# Altium PCB MSE450_G05_ASTEROIDS.PcbDoc
Units mm, origin at the board's own origin, x right, y up, seen from the top; angles counter-clockwise.
Board outline 75 x 130 mm, 2 copper layers (Top Layer, Bottom Layer); 21 components, 50 nets, 171 pads, 18 vias.
Unrouted connection lines stored in the file: 1.
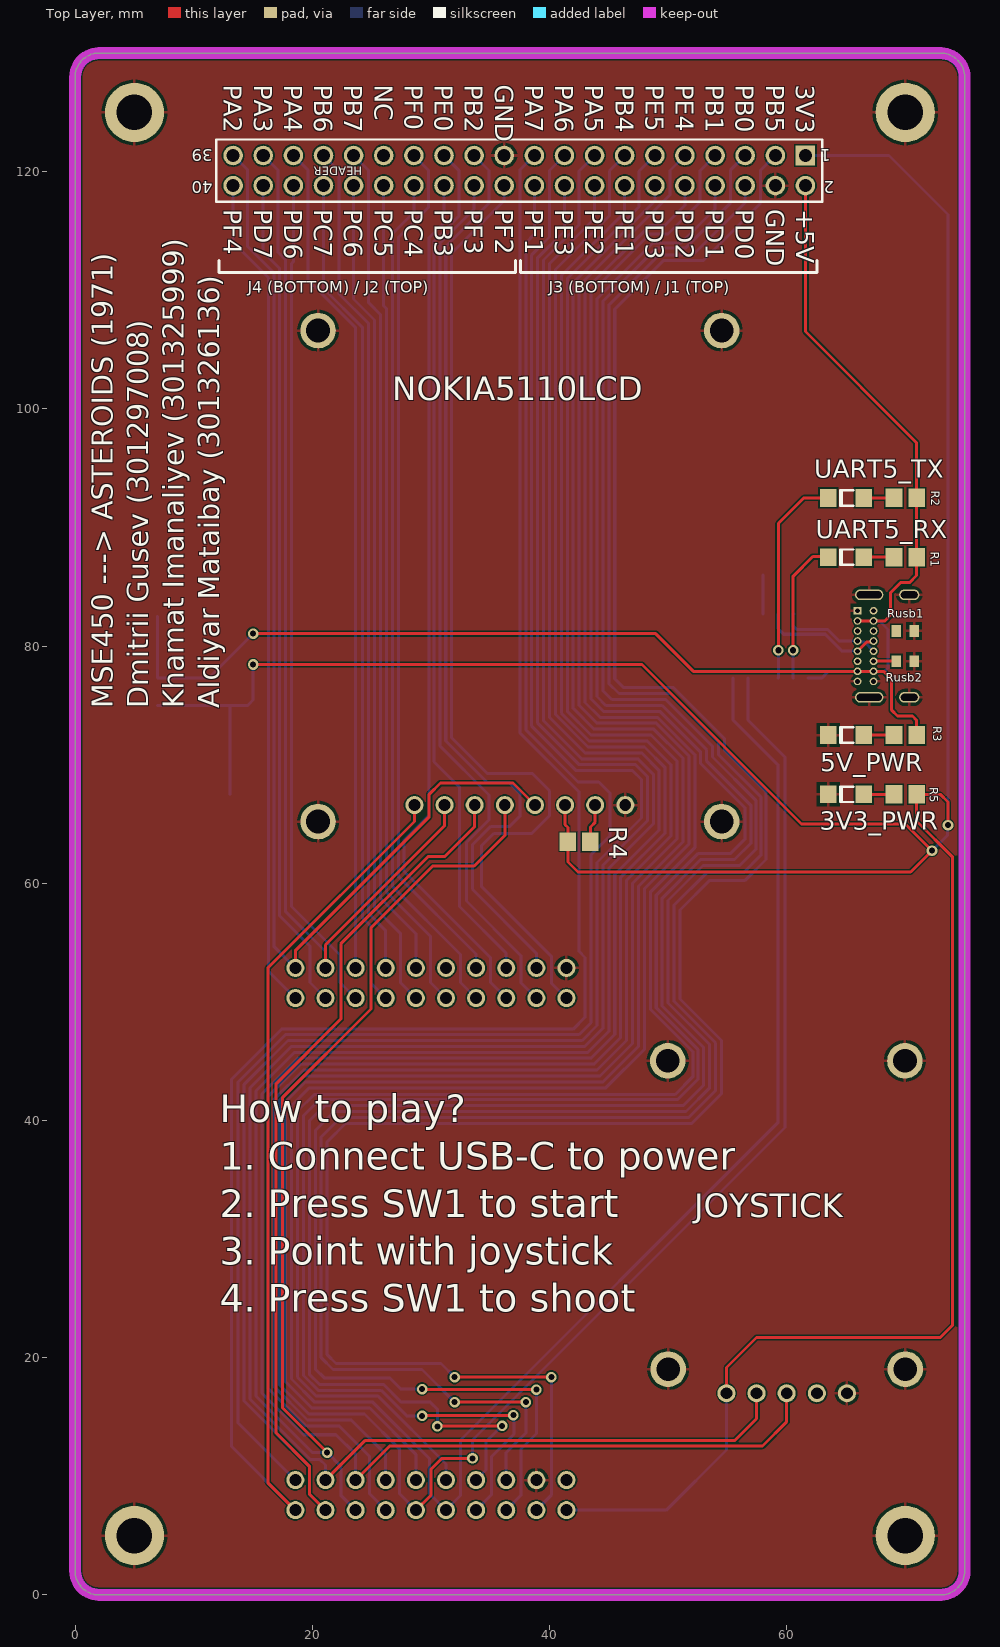
[diagram p0: Top Layer view]
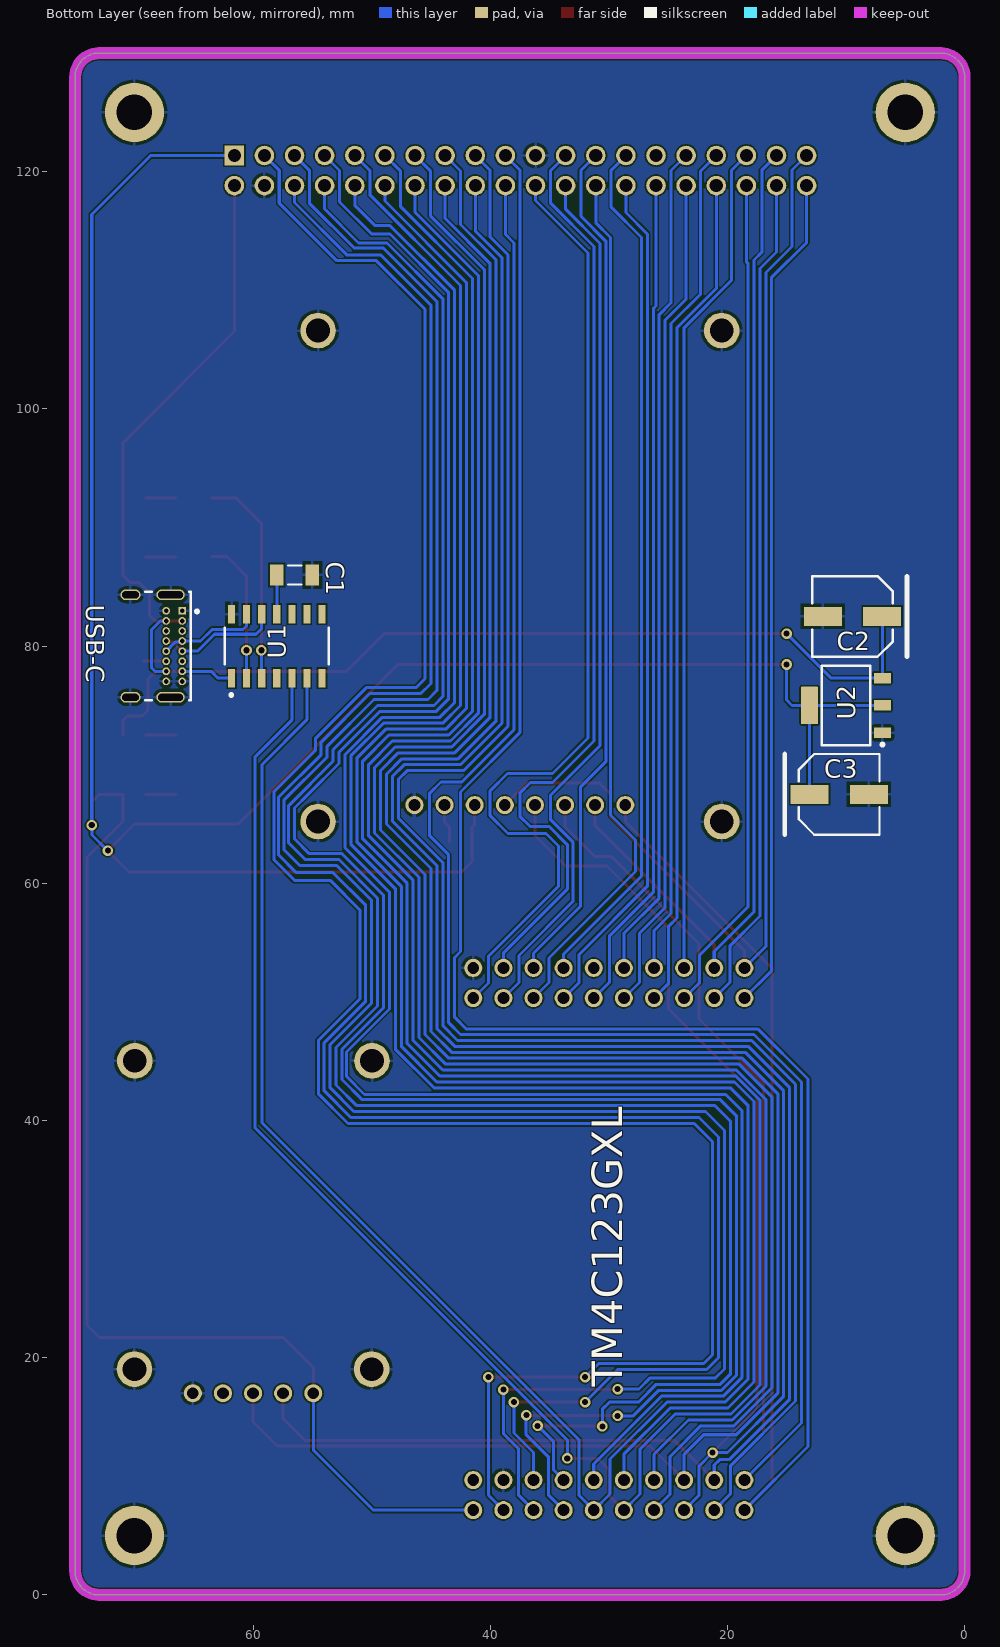
[diagram p1: Bottom Layer view, seen from below]
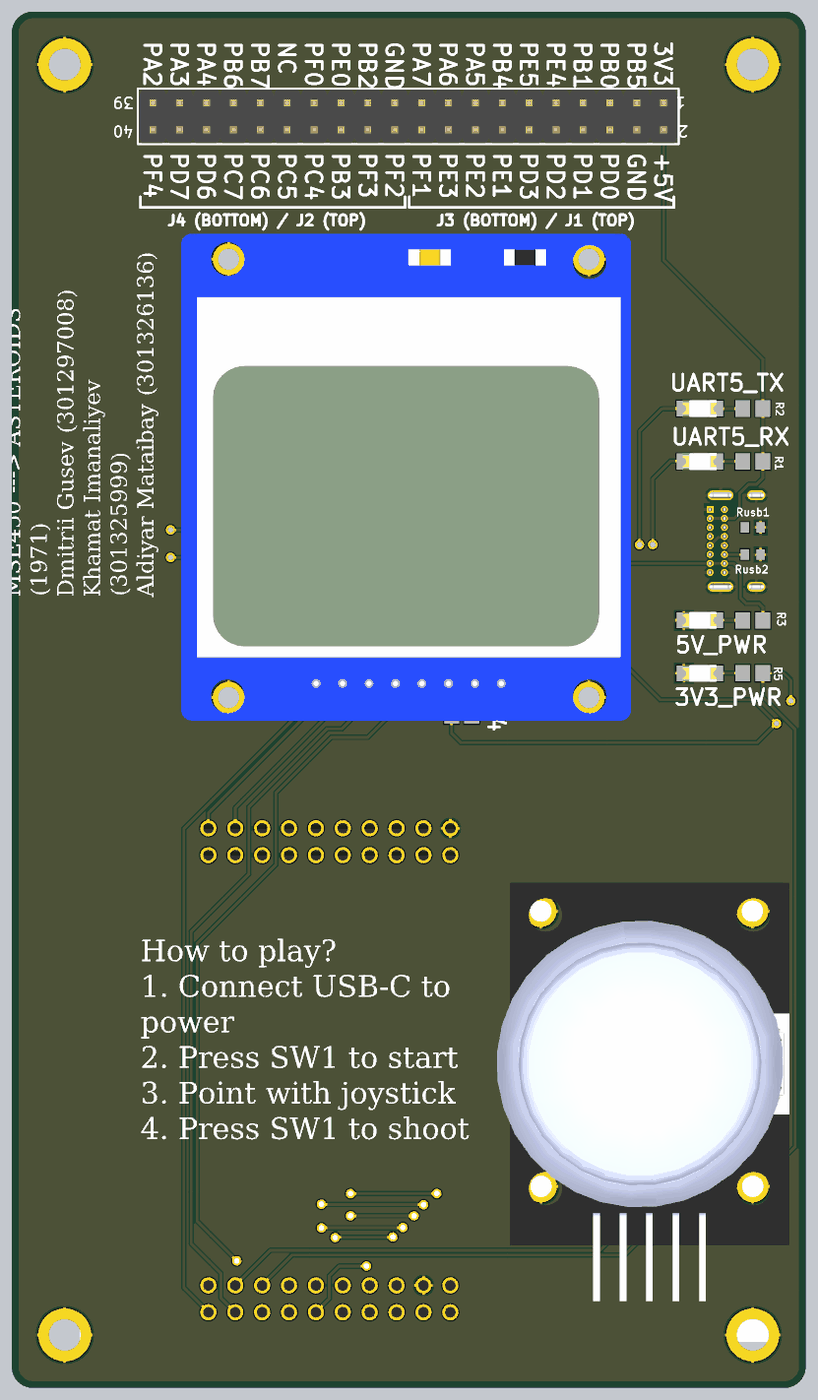
[diagram p2: 3D render of the assembled board from above, using the file's embedded part models]
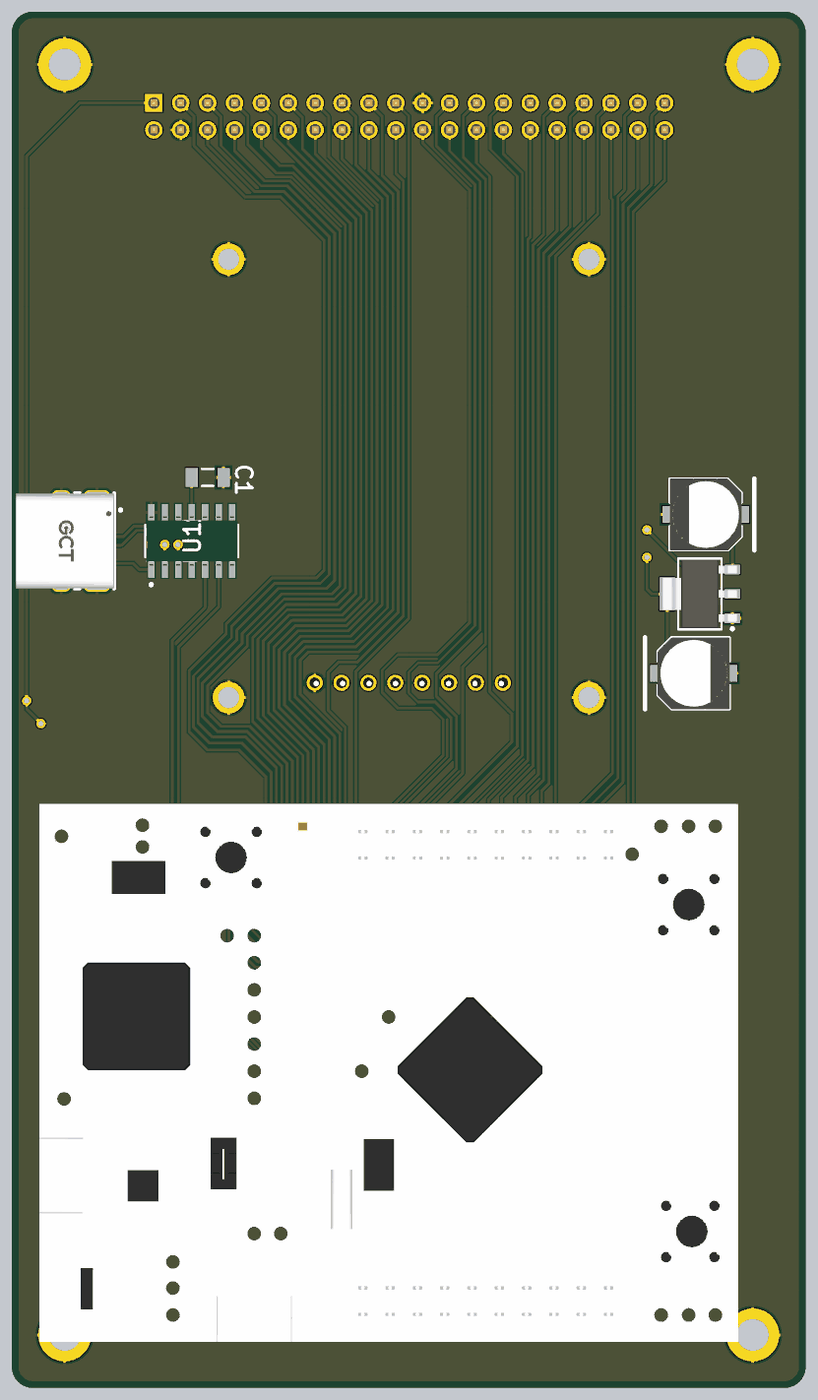
[diagram p3: 3D render of the assembled board from below, using the file's embedded part models]

## Layer stack, top to bottom
Top Solder: solder mask 0.0102, Solder Resist, Dk 3.5
Top Layer: signal copper 0.0356
Dielectric 1: dielectric 0.32, FR-4, Dk 4.8
Bottom Layer: signal copper 0.0356
Bottom Solder: solder mask 0.0102, Solder Resist, Dk 3.5

## Board outline
73,130 cw(c73,128) 75,128 75,2 cw(c73,2) 73,0 2,0 cw(c2,2) 0,2 0,128 cw(c2,128) 2,130

## Design rules (kind name [scope] priority, off if disabled: settings)
Clearance [All] p1: gap=0.127 ignorepadtopadclearanceinfootprint=FALSE except(0: Arc-Hole Track-Hole SMDPad-Hole THPad-Hole Via-Hole Fill-Hole Poly-Hole Region-Hole Text-Hole)
DiffPairsRouting [All] p1: maxlimit=0.254 minlimit=0.254 mostfreqgap=0.254 substack1={76AEA698-BA05-46CD-8F38-2EB70545F683} toplayer_{76aea698-ba05-46cd-8f38-2eb70545f683}_minwidth=0.381 toplayer_{76aea698-ba05-46cd-8f38-2eb70545f683}_maxwidth=0.381 toplayer_{76aea698-ba05-46cd-8f38-2eb70545f683}_prefwidth=0.381 bottomlayer_{76aea698-ba05-46cd-8f38-2eb70545f683}_minwidth=0.381 bottomlayer_{76aea698-ba05-46cd-8f38-2eb70545f683}_maxwidth=0.381 bottomlayer_{76aea698-ba05-46cd-8f38-2eb70545f683}_prefwidth=0.381 toplayer_minwidth=0.381 toplayer_maxwidth=0.381 toplayer_prefwidth=0.381 bottomlayer_minwidth=0.381 bottomlayer_maxwidth=0.381 bottomlayer_prefwidth=0.381 substack2={17D70BEA-12EE-4377-A149-2BB2C2ED7FCF} toplayer_{17d70bea-12ee-4377-a149-2bb2c2ed7fcf}_minwidth=0.381 toplayer_{17d70bea-12ee-4377-a149-2bb2c2ed7fcf}_maxwidth=0.381 toplayer_{17d70bea-12ee-4377-a149-2bb2c2ed7fcf}_prefwidth=0.381 bottomlayer_{17d70bea-12ee-4377-a149-2bb2c2ed7fcf}_minwidth=0.381 bottomlayer_{17d70bea-12ee-4377-a149-2bb2c2ed7fcf}_maxwidth=0.381 bottomlayer_{17d70bea-12ee-4377-a149-2bb2c2ed7fcf}_prefwidth=0.381 substack3={CADEAD71-19B0-48E9-878B-A2474DB00499} toplayer_{cadead71-19b0-48e9-878b-a2474db00499}_minwidth=0.381 toplayer_{cadead71-19b0-48e9-878b-a2474db00499}_maxwidth=0.381 toplayer_{cadead71-19b0-48e9-878b-a2474db00499}_prefwidth=0.381 bottomlayer_{cadead71-19b0-48e9-878b-a2474db00499}_minwidth=0.381 bottomlayer_{cadead71-19b0-48e9-878b-a2474db00499}_maxwidth=0.381 bottomlayer_{cadead71-19b0-48e9-878b-a2474db00499}_prefwidth=0.381 maxuncoupledlength=12.7
Height [All] p1: minheight=0 maxheight=100 prefheight=12.7
PolygonConnect [All] p1: connectstyle=Relief reliefconductorwidth=0.254 reliefentries=4 polygonreliefangle="90 Angle" airgapwidth=0.254
RoutingVias [All] p1: holewidth=0.711 width=1.27 viastyle="Through Hole" minholewidth=0.711 minwidth=1.27 maxholewidth=0.711 maxwidth=1.27
SolderMaskExpansion [All] p1: expansion=0.102 istentingtop=FALSE
Width [All] p1: maxlimit=0.254 minlimit=0.254 preferedwidth=0.254 substack1={76AEA698-BA05-46CD-8F38-2EB70545F683} substack2={17D70BEA-12EE-4377-A149-2BB2C2ED7FCF} substack3={CADEAD71-19B0-48E9-878B-A2474DB00499}
28 further rules are at their usual default settings.

## Components (designator, comment, footprint, x,y, rotation, side; value= is the part's Value field where it differs from the comment)
3V3_PWR "150120SS75000" 1206_A 65,67.5 r0 top
5V_PWR "150120SS75000" 1206_A 65,72.5 r0 top
C1 "10uF 6.3V 1206(3216)" CAPC1206(3216)190_N 56.5,86 r0 bottom value=10uF
C2 "10uF 50V" PNSC-FK-V-D_V 9.45,82.5 r0 bottom
C3 "10uF 50V" PNSC-FK-V-D_V 10.575,67.5 r180 bottom
HEADER "61304021121" 61304021121 37.45,120.1 r180 top
JOYSTICK "Joystick" joystick 60,17 r0 top
NOKIA5110LCD "NOKIA5110" NOKIA5110 37.5,66.6 r0 top
R1 "330R 5% 0805" RESC2013X60X40ML20T25 70,87.5 r180 top
R2 "330R 5% 0805" RESC2013X60X40ML20T25 70,92.5 r180 top
R3 "1K 5% 0805" RESC2013X60X40ML20T25 70,72.5 r180 top
R4 "330R 5% 0805" RESC2013X60X40ML20T25 42.5,63.5 r180 top
R5 "1K 5% 0805" RESC2013X60X40ML20T25 70,67.5 r180 top
Rusb1 "5K1 1% 0603" RESC1608X55X25ML10T15 70,81.275 r180 top
Rusb2 "5K1 1% 0603" RESC1608X55X25ML10T15 70,78.725 r180 top
TM4C123GXL "TIVA" TIVA 30,30 r90 bottom
U1 "MCP2221A-I/SL" FP-C04-065-SL-MFG 58,80 r90 bottom
U2 "LM1117MP-3.3/NOPB" DCY0004A_L 10,75 r0 bottom
UART5_RX "150120GS75000" 1206_A 65,87.5 r0 top
UART5_TX "150120GS75000" 1206_A 65,92.5 r0 top
USB-C "USB4085-GF-A" FP-USB4085-GF-A-MFG 70,80 r270 bottom

## Footprints (in the part's own frame and the unit in brackets; to place one, negate y for a bottom-side part, rotate by r counter-clockwise, add the part's x,y. Pads: shape width x height; smd on the part's side, far side on the other; paste and mask are expansions set on the pad)
1206_A [mm] "Chip LED, 2-Leads, Body 3.2x1.6mm, IPC Medium Density"
  rect 1.4x1.5 smd: 1(-1.5,0) 2(1.5,0)
  silkscreen extent -0.5,-0.66 0.6,0.65, body extent -1.6,-0.8 1.6,0.8, height 0.68
61304021121 [mm] "Pin Header, pitch 2.54 mm, THT, Vertical, dual row, 40p"
  rect 1.65x1.65 hole 1.1: 1(-24.13,-1.27)
  round 1.65 hole 1.1: 2(-24.13,1.27) 3(-21.59,-1.27) 4(-21.59,1.27) 5(-19.05,-1.27) 6(-19.05,1.27) 7(-16.51,-1.27) 8(-16.51,1.27) 9(-13.97,-1.27) 10(-13.97,1.27) 11(-11.43,-1.27) 12(-11.43,1.27) 13(-8.89,-1.27) 14(-8.89,1.27) 15(-6.35,-1.27) 16(-6.35,1.27) 17(-3.81,-1.27) 18(-3.81,1.27) 19(-1.27,-1.27) 20(-1.27,1.27) 21(1.27,-1.27) 22(1.27,1.27) 23(3.81,-1.27) 24(3.81,1.27) 25(6.35,-1.27) 26(6.35,1.27) 27(8.89,-1.27) 28(8.89,1.27) 29(11.43,-1.27) 30(11.43,1.27) 31(13.97,-1.27) 32(13.97,1.27) 33(16.51,-1.27) 34(16.51,1.27) 35(19.05,-1.27) 36(19.05,1.27) 37(21.59,-1.27) 38(21.59,1.27) 39(24.13,-1.27) 40(24.13,1.27)
  silkscreen extent -25.55,-2.62 25.55,2.62, body extent -25.4,-2.54 25.4,2.54, height 8.59
CAPC1206(3216)190_N [mm] "Chip Capacitor, Body 3.2x1.6mm, Height 1.9mm, IPC Medium Density"
  rect 1.15x1.8 smd: 1(-1.5,0) 2(1.5,0)
  silkscreen extent -0.55,-0.8 0.55,0.8, body extent -1.7,-0.9 1.7,0.9, height 1.9
DCY0004A_L [mm] "SOT223, 4-Leads, Body 6.7x3.7mm, Pitch 2.3mm, IPC High Density"
  rrect11% 1.45x0.9 smd: 1(-3.075,2.3) 2(-3.075,0) 3(-3.075,-2.3)
  rrect7% 1.45x3.15 smd: 4(3.075,0)
  silkscreen extent -3.2,-3.35 2.05,3.42, body extent -3.5,-3.25 3.5,3.25, height 1.62
FP-C04-065-SL-MFG [mm]
  rect 1.55x0.6 smd paste+0 mask+0: 1(-2.7,3.81) 2(-2.7,2.54) 3(-2.7,1.27) 4(-2.7,0) 5(-2.7,-1.27) 6(-2.7,-2.54) 7(-2.7,-3.81) 8(2.7,-3.81) 9(2.7,-2.54) 10(2.7,-1.27) 11(2.7,0) 12(2.7,1.27) 13(2.7,2.54) 14(2.7,3.81)
  silkscreen extent -4.25,-4.38 1.55,4.38, body extent -3,-4.32 3,4.32, height 1.75
FP-USB4085-GF-A-MFG [mm]
  rrect100% 0.9x2.4 hole 2.1 slot 0.6 at 0 deg paste-1000 mask+0: 1(-4.325,3.045) 2(4.325,3.045)
  rrect100% 0.9x1.7 hole 1.4 slot 0.6 at 0 deg paste-1000 mask+0: 3(-4.325,-0.335) 4(4.325,-0.335)
  rect 0.65x0.65 hole 0.4 paste-1000 mask+0: A1(-2.975,4.025)
  round 0.65 hole 0.4 paste-1000 mask+0: A4(-2.125,4.025) A5(-1.275,4.025) A6(-0.425,4.025) A7(0.425,4.025) A8(1.275,4.025) A9(2.125,4.025) A12(2.975,4.025) B1(2.975,2.675) B4(2.125,2.675) B5(1.275,2.675) B6(0.425,2.675) B7(-0.425,2.675) B8(-1.275,2.675) B9(-2.125,2.675) B12(-2.975,2.675)
  silkscreen extent -4.57,0.89 4.57,5.39, body extent -4.47,-4.59 4.48,4.58, height 3.66
joystick [mm]
  round 1.524 hole 1: 1(-5.08,0) 2(-2.54,0) 3(0,0) 4(2.54,0) 5(5.08,0)
  round 3 hole 2: 5(-10.033,28.032) 5(-10,2.032) 5(9.967,28.032) 5(10,2.032)
  body extent -14.21,-8.81 13.45,30.74, height 34.52
NOKIA5110 [mil]
  round 60 hole 39.37: 1(-350,0) 2(-250,0) 3(-150,0) 4(-50,0) 5(50,0) 6(150,0) 7(250,0) 8(350,0)
  round 118.11 hole 78.74: 8(-670,-55) 8(-670,1575) 8(670,-55) 8(670,1575)
  body extent -847,-141 827,1671, height 236
PNSC-FK-V-D_V [mm] "CAPAE, 2-Leads, Body 6.80x6.80mm"
  rect 3.2x1.6 smd: 1(-2.5,0) 2(2.5,0)
  silkscreen extent -4.6,-3.4 3.4,3.4, body extent -3.9,-3.4 3.9,3.4, height 6.1
RESC1608X55X25ML10T15 [mm] "Chip Resistor, 2-Leads, Body 1.60x0.80mm, IPC Low Density"
  rect 0.8x1 smd: 1(-0.75,0) 2(0.75,0)
  body extent -0.85,-0.45 0.85,0.45, height 0.55
RESC2013X60X40ML20T25 [mm] "Chip Resistor, 2-Leads, Body 2.00x1.25mm, IPC Low Density"
  rect 1.4x1.55 smd: 1(-0.95,0) 2(0.95,0)
  body extent -1.1,-0.72 1.1,0.72, height 0.6
TIVA [mil]
  round 60 hole 39.37: 1(-900,450) 2(-900,350) 3(-900,250) 4(-900,150) 5(-900,50) 6(-900,-50) 7(-900,-150) 8(-900,-250) 9(-900,-350) 10(-900,-450) 11(900,-450) 12(900,-350) 13(900,-250) 14(900,-150) 15(900,-50) 16(900,50) 17(900,150) 18(900,250) 19(900,350) 20(900,450) 21(-800,450) 22(-800,350) 23(-800,250) 24(-800,150) 25(-800,50) 26(-800,-50) 27(-800,-150) 28(-800,-250) 29(-800,-350) 30(-800,-450) 31(800,-450) 32(800,-350) 33(800,-250) 34(800,-150) 35(800,-50) 36(800,50) 37(800,150) 38(800,250) 39(800,350) 40(800,450)
  body extent -1010,-930 990,1670, height 689

## Part data
3V3_PWR 5V_PWR: library part CMP-1426-00017-1, "SMD mono-color Chip LED, WL-SMCW, Super Red", Color="Super Red", Manufacturer="Wuerth Elektronik", ComponentLink1Description="Manufacturer URL", ComponentLink1URL=http://www.we-online.com, ComponentLink2Description=Datasheet, ComponentLink2URL=http://katalog.we-online.com/led/datasheet/150120SS75000.pdf, PackageReference=1206_A, PartNumber=150120SS75000
C1: library part CMP-1037-04961-1, "CAP 10uF 6.3V ±10% 1206 (3216 Metric) Thickness 1.9mm SMD", Case-EIA=1206, Case-Metric=3216, Rated Voltage="6.3 V", Tolerance=Â±10%, Max Thickness="1.9 mm", Technology=SMT
C2 C3: library part CMP-2000-06207-1, "Aluminum Electrolytic Capacitor, 10 uF, +/- 20%, 50 V, 2-Pin SMD (Size Code D), -55 to 105 degC, RoHS, Tape and Reel", Capacitance=10µF, Case Size/Dimension=Ø6.3x5.8mm, Lifetime@Temperature=2000Hrs@105°C, Manufacturer=Panasonic, Operating Temp Range=-55to+105°C, Operating Temp-Max=105°C, Package Description="2-Pin Electrolytic Aluminum Capacitor, Body 6.6 x 6.6 mm", Package Reference=FK-V-D, Rated Voltage=50V, Ripple Current=165mA, Datasheet URL=http://industrial.panasonic.com/cdbs/www-data/pdf/RDE0000/ABA0000C1181.pdf, Datasheet Version=03/2016, Impedance=0.88O, Manufacturer URL=http://www.panasonic.com/, Mounting Technology=SurfaceMount, Package URL=http://industrial.panasonic.com/cdbs/www-data/pdf/RDE0000/DME0000COL48.pdf, Series=FK, Type=Can
HEADER: library part CMP-1502-01135-1, "THT Vertical Pin Header WR-PHD, Pitch 2.54 mm, Dual Row, 40 pins", Contact Resistance=20mOhm, Manufacturer="Wurth Elektronik", Operating Temperature=-40to105degC, Rated Current=3A, Withstanding Voltage=500VAC, Working Voltage=250VAC, Datasheet URL=https://katalog.we-online.de/em/datasheet/6130xx21121.pdf, Gender=Male, Manufacturer URL=http://www.we-online.de, Mounting Technology=THT, Orientation=Vertical, Package Reference=61304021121, Packaging=Bag, Part Number=61304021121, Pin Number=40, Pitch=2.54mm, Publisher=WurthElektronik, Row Number=Dual
R1 R2 R3 R4 R5: library part CMP-2001-00590-1, Manufacturer=Panasonic, Part Number=ERA6AEB123V
Rusb1 Rusb2: library part CMP-2000-04091-1, Manufacturer=Yageo, Part Number=RC0603FR-075K1L
U1: library part CMP-06284-000011-1, "IC USB TO I2C/UART 14SOIC", Ambient Temperature Range High=+85°C, Ambient Temperature Range Low=-40°C, Manufacturer=Microchip, Max Junction Temp=+150°C, Max Supply Voltage=5.5V, Min Supply Voltage=3V, Nominal Supply Current=10-13mA, Package=C04-065-SL, Temperature="-40°C to +85°C", Automotive=Yes, Automotive Grade="Grade 3", Category=IC, ComponentLink2Description=Datasheet, ComponentLink2URL=http://ww1.microchip.com/downloads/en/DeviceDoc/20005565B.pdf, Data Rate=12Mbits/s, Device Class L1="Integrated Circuits (ICs)", Device Class L2="Interface ICs", Device Class L3="USB Interface ICs", Digikey Description="IC USB TO I2C/UART 14SOIC", Footprint Url=http://ww1.microchip.com/downloads/en/DeviceDoc/14L%20SOIC%203_90%20mm%20%28SL%29%20C04-00065d.pdf, Height=1.75mm, Interface=I2C,UART,USB, Ipc Land Pattern Name=SOIC127P600X175-14, Lead Free=Yes, Manufacturer Part Number=MCP2221A-I/SL, Octopart=https://octopart.com/mcp2221a-i%2Fsl-microchip-71704986, RoHS=TRUE, Standoff Height=0.1mm, Temperature Range High=+85°C, Temperature Range Low=-40°C, Usb Standard="USB 2.0"
U2: library part CMP-0062-01638-4, "800mA Low-Dropout Linear Regulator, 4-pin SOT-223, Pb-Free", Manufacturer="Texas Instruments", PackageTopMarking=XYTT*N05A, PowerWise=N, Code_IPC=SOT223-4, Code_JEDEC=TO-261-AA, ComponentLink1Description="Datasheet URL", ComponentLink1URL=http://www.ti.com/general/docs/lit/getliterature.tsp?genericPartNumber=LM1117-N&fileType=pdf, CompType="LDO IC", High-Reliability=Y, PackageDescription="Molded SOT-223, 6.50 x 3.56 x 1.6mm Body, 4 Lead, 2.3mm Pitch", PackageReference=DCY0004A, PartNumber=LM1117MP-3.3/NOPB, PinCount=4, RoHS=Y
UART5_RX UART5_TX: library part CMP-1426-00014-1, "SMD mono-color Chip LED, WL-SMCW, Green", Color=Green, Manufacturer="Wuerth Elektronik", ComponentLink1Description="Manufacturer URL", ComponentLink1URL=http://www.we-online.com, ComponentLink2Description=Datasheet, ComponentLink2URL=http://katalog.we-online.com/led/datasheet/150120GS75000.pdf, PackageReference=1206_A, PartNumber=150120GS75000
USB-C: library part CMP-196119-000001-1, "CONN RCPT USB2.0 TYPEC 16POS", Current Rating=4.25A, Manufacturer="Global Connector Technology", Package=0, Temperature="-40°C to +85°C", Temperature Range High=+85°C, Temperature Range Low=-40°C, Voltage Rating=20V, Automotive=No, Category=Conn, ComponentLink2Description=Datasheet, ComponentLink2URL=https://gct.co/files/drawings/usb4085.pdf, Conn Orientation="Right Angle", Contact Material=Gold,Nickel, Device Class L1=Connectors, Device Class L2="USB Connectors", Device Class L3=unset, Digikey Description="CONN RCPT USB2.0 TYPEC 16POS", Height=3.66mm, Is Female=yes, Lead Free=Yes, Manufacturer Part Number=USB4085-GF-A, Number Of Contacts=16, Octopart=https://octopart.com/usb4085-gf-a-global+connector+technology-94773699, Pitch=0.85mm, RoHS=TRUE, Shielding=true, Usb Standard="USB 2.0"

## Free pads (board coordinates)
  round 5 hole 3: 17(5,5) 17(5,125) 17(70,5) 17(70,125)

## Via types
v1: diameter 0.889, hole 0.508, Top Layer to Bottom Layer, 18 vias

## Nets (pads, with @x,y where several pads share a name; then routed paths per layer and width w, separated by ;. In a path a pad name is that pad's centre, name@x,y a point inside that pad or via, vN(x,y) a via of type N, cw(c..) or ccw(c..) an arc to the next point about the centre after c; other vN are vias at no path point)
+3V3: C3.1 HEADER.1 JOYSTICK.1 NOKIA5110LCD.6 R4.2 R5.1 TM4C123GXL.1 U2.2 U2.4 | length 281.5
  Top Layer w0.254: v1(15,78.45) 47.8,78.45 61.25,65 70,65 v1(72.25,62.75) 70.45,60.95 42.4,60.95 41.55,61.8 R4.2 41.55,64.7 41.31,64.94 NOKIA5110LCD.6 ; JOYSTICK.1 54.92,19.17 57.45,21.7 72.95,21.7 74,22.75 74,62.2 70.95,65.25 R5.1 72.95,67.5 73.6,66.85 v1(73.6,64.9)
  Bottom Layer w0.254: U2.2 U2.4 ; C3.1 U2.4 ; v1(15,78.45) 15,75.45 14.55,75 U2.4 ; TM4C123GXL.1 49.84,7.14 54.92,12.22 JOYSTICK.1 ; HEADER.1 68.63,121.37 73.6,116.4 v1(73.6,64.9) 73.575,64.875 73.575,64.074 v1(72.25,62.75)
+5V: C2.1 HEADER.2 R1.1 R2.1 R3.1 U1.1 U2.3 USB-C.A4 USB-C.A9 USB-C.B4 USB-C.B9 | length 131.6
  Top Layer w0.254: v1(15,81.05) 48.95,81.05 52.125,77.875 USB-C.A9 USB-C.B4 68.175,77.875 68.85,77.2 68.85,74.6 69.35,74.1 70.6,74.1 70.95,73.75 R3.1 ; HEADER.2 61.58,106.52 70.95,97.15 R2.1 R1.1 70.95,85.95 70.35,85.35 69.6,85.35 68.75,84.5 68.75,82.6 68.275,82.125 USB-C.B9 USB-C.A4
  Bottom Layer w0.254: C2.1 6.925,82.475 U2.3 11.25,77.3 v1(15,81.05) ; U1.1 62.95,77.3 63.525,77.875 USB-C.A9 ; USB-C.B4 67.325,77.925 67.35,77.95 67.425,77.875 68.275,77.875 68.55,78.15 68.55,81.4 67.825,82.125 USB-C.B9
GND: 3V3_PWR.1 5V_PWR.1 C1.1 C2.2 C3.2 HEADER.4 HEADER.21 JOYSTICK.5 NOKIA5110LCD.8 pad.17 Rusb1.1 Rusb2.1 TM4C123GXL.20 TM4C123GXL.22 U1.14 U2.1 USB-C.1 USB-C.2 USB-C.3 USB-C.4 USB-C.A1 USB-C.A12 USB-C.B1 USB-C.B12
JOYSTICK_X: HEADER.16 JOYSTICK.3 TM4C123GXL.28 | length 191.4
  Top Layer w0.254: TM4C123GXL.28 26.52,12.55 57.95,12.55 60,14.6 JOYSTICK.3
  Bottom Layer w0.254: TM4C123GXL.28 23.65,11.85 22,13.5 19.25,13.5 15.75,17 15.75,42.25 18.75,45.25 43.5,45.25 45.5,47.25 45.5,60.75 49.25,64.5 49.25,69.5 47.75,71 43,71 40,74 40,112.25 43.8,116.05 HEADER.16
JOYSTICK_Y: HEADER.18 JOYSTICK.2 TM4C123GXL.29 | length 189
  Top Layer w0.254: TM4C123GXL.29 21.02,9.68 21,9.7 21.13,9.7 24.43,13 55.6,13 57.46,14.86 JOYSTICK.2
  Bottom Layer w0.254: TM4C123GXL.29 21.11,10.94 20.65,11.4 19.85,11.4 14.75,16.5 14.75,42.75 18.25,46.25 43,46.25 44.5,47.75 44.5,61.5 48.25,65.25 48.25,69 47.25,70 42.5,70 39,73.5 39,112.75 41.26,115.01 HEADER.18
LCD_CE: HEADER.37 NOKIA5110LCD.2 TM4C123GXL.12 | length 88.6
  Top Layer w0.254: TM4C123GXL.12 21.11,54.81 31.15,64.85 NOKIA5110LCD.2
  Bottom Layer w0.254: HEADER.37 17.1,120.13 17.1,113.2 17.75,112.55 17.75,57.6 21.11,54.24 TM4C123GXL.12
LCD_CLK: HEADER.39 NOKIA5110LCD.5 TM4C123GXL.11 | length 100.1
  Top Layer w0.254: TM4C123GXL.11 18.57,54.32 29.85,65.6 29.85,67.5 30.8,68.45 36.92,68.45 NOKIA5110LCD.5
  Bottom Layer w0.254: HEADER.39 14.55,120.14 14.55,113.7 16.75,111.5 16.75,54.68 TM4C123GXL.11
LCD_DIN: HEADER.15 NOKIA5110LCD.4 TM4C123GXL.8 | length 221.2
  Top Layer w0.254: v1(21.25,12) 17.5,15.75 17.5,41.95 24.95,49.4 24.95,56.25 30.15,61.45 33.65,61.45 36.23,64.03 NOKIA5110LCD.4
  Bottom Layer w0.254: TM4C123GXL.8 22.4,8.39 22.4,10.85 v1(21.25,12) 20,12 15.25,16.75 15.25,42.5 18.5,45.75 43.25,45.75 45,47.5 45,61.25 48.75,65 48.75,69.2 47.45,70.5 42.7,70.5 39.5,73.7 39.5,112.55 42.5,115.55 42.5,120.07 HEADER.15
LCD_DO: HEADER.17 NOKIA5110LCD.3 TM4C123GXL.9 | length 222.3
  Top Layer w0.254: TM4C123GXL.9 19.75,8.5 19.75,10.85 16.95,13.65 16.95,43.1 22.4,48.55 22.4,54.9 29.75,62.25 31.15,62.25 33.69,64.79 NOKIA5110LCD.3
  Bottom Layer w0.254: TM4C123GXL.9 19.75,8.5 19.75,10.85 14.25,16.35 14.25,43.05 17.95,46.75 42.75,46.75 44,48 44,61.75 47.75,65.5 47.75,68.75 47,69.5 42.25,69.5 38.5,73.25 38.5,113 40,114.5 40,120.11 41.15,121.26 41.15,121.4 41.18,121.37 HEADER.17
LCD_RST: HEADER.19 NOKIA5110LCD.1 TM4C123GXL.10 | length 211.5
  Top Layer w0.254: TM4C123GXL.10 16.25,9.46 16.25,52.85 28.61,65.21 NOKIA5110LCD.1
  Bottom Layer w0.254: TM4C123GXL.10 13.2,12.51 13.2,43.5 17.4,47.7 42,47.7 43,48.7 43,53.75 42.5,54.25 42.5,67.7 37.5,72.7 37.5,120.15 HEADER.19
Net3V3_PWR_2: 3V3_PWR.2 R5.2 | length 2.6
  Top Layer w0.254: 3V3_PWR.2 R5.2
Net5V_PWR_2: 5V_PWR.2 R3.2 | length 2.6
  Top Layer w0.254: 5V_PWR.2 R3.2
NetC1_2: C1.2 U1.11 | length 3.3
  Bottom Layer w0.254: U1.11 C1.2
NetNOKIA5110LCD_7: NOKIA5110LCD.7 R4.1 | length 3.3
  Top Layer w0.254: R4.1 43.45,64.75 43.85,65.15 NOKIA5110LCD.7
NetR1_2: R1.2 UART5_RX.2 | length 2.6
  Top Layer w0.254: UART5_RX.2 R1.2
NetR2_2: R2.2 UART5_TX.2 | length 2.6
  Top Layer w0.254: UART5_TX.2 R2.2
NetRusb1_2: Rusb1.2 USB-C.A5
NetRusb2_2: Rusb2.2 USB-C.B5 | length 1.9
  Top Layer w0.254: USB-C.B5 Rusb2.2
PA4: HEADER.35 TM4C123GXL.13 | length 70.7
  Bottom Layer w0.254: HEADER.35 19.65,120.12 19.65,110.85 23.65,106.85 TM4C123GXL.13
PB0: HEADER.5 TM4C123GXL.3 | length 184.8
  Top Layer w0.254: v1(29.25,17.35) 29.275,17.325 38.875,17.325 v1(38.9,17.3)
  Bottom Layer w0.254: v1(29.25,17.35) 27.45,17.35 26.5,18.3 21,18.3 20.25,19.05 20.25,39.15 21.85,40.75 51.5,40.75 53.5,42.75 53.5,46.4 50,49.9 50,58.55 52.95,61.5 56.05,61.5 57.4,62.85 57.4,67 53.75,70.65 53.75,71.55 49.8,75.5 45.25,75.5 44.5,76.25 44.5,109.05 49,113.55 51.45,113.55 55.25,117.35 55.25,120.12 HEADER.5 ; TM4C123GXL.3 37.6,8.39 37.6,12.3 38.9,13.6 v1(38.9,17.3)
PB1: HEADER.7 TM4C123GXL.4 | length 182.4
  Top Layer w0.254: v1(29.25,15.1) 29.275,15.125 36.925,15.125 v1(36.95,15.15)
  Bottom Layer w0.254: v1(29.25,15.1) 27.95,15.1 25.8,17.25 20.5,17.25 19.25,18.5 19.25,40.4 20.6,41.75 50.8,41.75 52.5,43.45 52.5,46 49,49.5 49,59 52.5,62.5 55.25,62.5 56.5,63.75 56.5,66.35 55.35,67.5 52.75,70.1 52.75,71.05 49.3,74.5 44.55,74.5 43.5,75.55 43.5,109.8 48.45,114.75 50,114.75 52.7,117.45 52.7,120.11 HEADER.7 ; TM4C123GXL.4 35.1,8.43 35.1,11.65 37,13.55 37,15.1 v1(36.95,15.15)
PB2: HEADER.23 TM4C123GXL.19 | length 79
  Bottom Layer w0.254: HEADER.23 34.9,120.11 34.9,117.35 31.25,113.7 31.25,72 34.75,68.5 36.6,68.5 37.5,67.6 37.5,65.65 36.65,64.8 35.05,64.8 33.5,63.25 33.5,59.5 38.89,54.11 TM4C123GXL.19
PB3: HEADER.26 TM4C123GXL.38 | length 73.5
  Bottom Layer w0.254: HEADER.26 31.1,115.7 29.85,114.45 29.85,65.75 27.75,63.65 27.75,61 35.04,53.71 35.04,51.63 TM4C123GXL.38
PB4: HEADER.13 TM4C123GXL.7 | length 157.4
  Bottom Layer w0.254: TM4C123GXL.7 24.83,8.5 24.83,11.67 22.25,14.25 19.45,14.25 16.25,17.45 16.25,42 19,44.75 43.75,44.75 46,47 46,60.5 49.75,64.25 49.75,69.75 48,71.5 43.25,71.5 40.5,74.25 40.5,111.75 45.05,116.3 45.05,120.08 HEADER.13
PB5: HEADER.3 TM4C123GXL.2 | length 184.9
  Top Layer w0.254: v1(32,18.35) v1(40.15,18.35)
  Bottom Layer w0.254: v1(32,18.35) 30.85,19.5 22,19.5 21.25,20.25 21.25,38.2 22.8,39.75 52,39.75 54.5,42.25 54.5,46.75 51,50.25 51,57.75 53.5,60.25 56.5,60.25 58.25,62 58.25,67.7 54.75,71.2 54.75,72.2 50.45,76.5 46.25,76.5 45.5,77.25 45.5,108.4 49.6,112.5 52.94,112.5 57.79,117.35 57.79,120.12 HEADER.3 ; TM4C123GXL.2 40.15,8.4 v1(40.15,18.35)
PB6: HEADER.33 TM4C123GXL.14 | length 70.7
  Bottom Layer w0.254: HEADER.33 22.25,120.06 22.25,109.7 24.75,107.2 24.75,57.45 26.19,56.01 TM4C123GXL.14
PB7: HEADER.31 TM4C123GXL.15 | length 70.7
  Bottom Layer w0.254: HEADER.31 24.75,120.1 24.75,108.95 25.75,107.95 25.75,58.75 28.73,55.77 TM4C123GXL.15
PC4: HEADER.28 TM4C123GXL.37 | length 72.2
  Bottom Layer w0.254: HEADER.28 28.56,116.56 26.75,114.75 26.75,59.75 32.5,54 32.5,51.63 TM4C123GXL.37
PC5: HEADER.30 TM4C123GXL.36 | length 70.7
  Bottom Layer w0.254: HEADER.30 26.02,108.68 26.25,108.45 26.25,59.25 29.96,55.54 29.96,51.63 TM4C123GXL.36
PC6: HEADER.32 TM4C123GXL.35 | length 70.7
  Bottom Layer w0.254: HEADER.32 23.48,109.27 25.25,107.5 25.25,57.95 27.42,55.78 27.42,51.63 TM4C123GXL.35
PC7: HEADER.34 TM4C123GXL.34 | length 70.7
  Bottom Layer w0.254: HEADER.34 20.94,110.16 24.25,106.85 24.25,57.074 24.95,56.374 24.95,51.56 TM4C123GXL.34
PD0: HEADER.6 TM4C123GXL.23 | length 176.4
  Top Layer w0.254: v1(32,16.25) v1(38,16.25)
  Bottom Layer w0.254: v1(32,16.25) 29.25,19 21.75,19 20.75,20 20.75,38.6 22.4,40.25 51.75,40.25 54,42.5 54,46.55 50.5,50.05 50.5,58.15 53.25,60.9 56.35,60.9 57.85,62.4 57.85,67.25 54.25,70.85 54.25,71.9 50.15,76 45.85,76 45,76.85 45,108.75 49.25,113 52.1,113 56.5,117.4 HEADER.6 ; TM4C123GXL.23 36.35,12 38,13.65 v1(38,16.25)
PD1: HEADER.8 TM4C123GXL.24 | length 176
  Top Layer w0.254: v1(30.55,14.2) 30.575,14.225 35.975,14.225 v1(36,14.25)
  Bottom Layer w0.254: v1(30.55,14.2) 30.55,15.65 29.95,16.25 27.5,16.25 26,17.75 20.6,17.75 19.75,18.6 19.75,39.95 21.05,41.25 51.25,41.25 53,43 53,46.15 49.5,49.65 49.5,58.75 52.75,62 55.6,62 57,63.4 57,66.55 53.25,70.3 53.25,71.25 49.5,75 44.75,75 44,75.75 44,109.3 48.7,114 51.1,114 53.96,116.86 HEADER.8 ; TM4C123GXL.24 34.65,10.52 34.65,12.9 v1(36,14.25)
PD2: HEADER.10 TM4C123GXL.25 | length 163
  Bottom Layer w0.254: TM4C123GXL.25 31.27,11.03 25.55,16.75 20.35,16.75 18.75,18.35 18.75,40.8 20.15,42.2 50.6,42.2 52.119,43.719 52.119,45.781 48.5,49.4 48.5,59.25 52.25,63 52.25,70.85 49.1,74 44.25,74 43,75.25 43,110 48.45,115.45 49.7,115.45 51.42,117.17 HEADER.10
PD3: HEADER.12 TM4C123GXL.26 | length 154.8
  Bottom Layer w0.254: TM4C123GXL.26 28.73,11.85 24.83,15.75 19.95,15.75 17.75,17.95 17.75,41.6 19.4,43.25 44.5,43.25 47.5,46.25 47.5,59.75 51.25,63.5 51.25,70.55 48.8,73 43.75,73 42,74.75 42,110.65 48.88,117.53 HEADER.12
PD6: HEADER.36 TM4C123GXL.33 | length 70.8
  Bottom Layer w0.254: HEADER.36 18.4,112.4 18.25,112.25 18.25,58.05 22.34,53.96 22.34,51.63 TM4C123GXL.33
PD7: HEADER.38 TM4C123GXL.32 | length 70.9
  Bottom Layer w0.254: HEADER.38 15.86,113.24 17.25,111.85 17.25,57.25 19.8,54.7 19.8,51.63 TM4C123GXL.32 TM4C123GXL.32@21.11,50.26 ; TM4C123GXL.32@20.9,50.45 20.9,50.4 TM4C123GXL.32@20.98,50.32
PE0: HEADER.25 TM4C123GXL.18 | length 72.4
  Bottom Layer w0.254: HEADER.25 32.35,120.12 32.35,116.25 30.25,114.15 30.25,70.25 32.4,68.1 32.4,58.05 36.35,54.1 TM4C123GXL.18
PE1: HEADER.14 TM4C123GXL.27 | length 152.5
  Bottom Layer w0.254: TM4C123GXL.27 26.19,11.85 23.29,14.75 19.6,14.75 16.75,17.6 16.75,41.75 19.25,44.25 44,44.25 46.5,46.75 46.5,60.25 50.25,64 50.25,70 48.25,72 43.35,72 41,74.35 41,111.25 46.34,116.59 46.34,118.79 46.35,118.8 46.34,118.81 HEADER.14
PF0: HEADER.27 TM4C123GXL.17 | length 72.8
  Bottom Layer w0.254: HEADER.27 29.8,120.13 29.8,117 27.25,114.45 27.25,60.6 33.81,54.04 TM4C123GXL.17
PF1: HEADER.20 TM4C123GXL.30 | length 142.9
  Bottom Layer w0.254: TM4C123GXL.30 13.75,14.5 13.75,43.25 17.75,47.25 42.5,47.25 43.5,48.25 43.5,62.4 45.1,64 45.1,67.6 44.15,68.55 42.4,68.55 38,72.95 38,114 38.72,114.72 HEADER.20
PF2: HEADER.22 TM4C123GXL.40 | length 83.2
  Bottom Layer w0.254: HEADER.22 36.18,117.58 31.75,113.15 31.75,72.25 34.75,69.25 38.55,69.25 40,67.8 40,65.7 38.5,64.2 35.3,64.2 34.25,63.15 34.25,59.75 40.15,53.85 40.15,51.6 TM4C123GXL.40
PF3: HEADER.24 TM4C123GXL.39 | length 74.7
  Bottom Layer w0.254: HEADER.24 33.64,116.84 30.75,113.95 30.75,71.6 34.9,67.45 34.9,65.35 33,63.45 33,58.5 37.58,53.92 37.58,51.63 TM4C123GXL.39
PF4: HEADER.40 TM4C123GXL.31 | length 70.7
  Bottom Layer w0.254: HEADER.40 13.32,114.03 16.3,111.05 16.3,52.59 TM4C123GXL.31
RX_LED: U1.2 UART5_RX.1 | length 12.3
  Top Layer w0.254: v1(60.55,79.65) 60.55,85.9 62.2,87.55 63.45,87.55 UART5_RX.1
  Bottom Layer w0.254: U1.2 60.545,77.305 60.545,79.645 v1(60.55,79.65)
TIVA_UART5_RX: HEADER.9 TM4C123GXL.5 U1.6 | length 244.8
  Bottom Layer w0.254: HEADER.9 50.15,120.1 50.15,118.05 42.5,110.4 42.5,75 44,73.5 49,73.5 51.75,70.75 51.75,63.3 48,59.55 48,46 44.75,42.75 19.75,42.75 18.25,41.25 18.25,18.2 20.2,16.25 25.1,16.25 29.9,11.45 29.9,8.51 TM4C123GXL.5 32.5,8.37 32.5,13.05 59.25,39.8 59.25,70.005 55.46,73.795 U1.6
TIVA_UART5_TX: HEADER.11 TM4C123GXL.6 U1.5 | length 246
  Top Layer w0.254: TM4C123GXL.6 30,8.41 30,10.6 30.905,11.505 v1(33.505,11.505)
  Bottom Layer w0.254: TM4C123GXL.6 27.37,8.5 27.37,12.28 24.4,15.25 19.7,15.25 17.25,17.7 17.25,41.711 19.289,43.75 44.25,43.75 47,46.5 47,60 50.75,63.75 50.75,70.3 48.55,72.5 43.5,72.5 41.5,74.5 41.5,111 47.55,117.05 47.55,120.04 HEADER.11 ; v1@33.5,11.5 33.5,13.05 59.85,39.4 59.85,70.633 56.73,73.753 U1.5
TX_LED: U1.3 UART5_TX.1 | length 18.2
  Top Layer w0.254: v1(59.3,79.65) 59.3,90.35 61.45,92.5 UART5_TX.1
  Bottom Layer w0.254: U1.3 59.3,77.33 v1(59.3,79.65)
USBC-DM: U1.12 USB-C.A7 USB-C.B7 | length 10.4
  Top Layer w0.254: USB-C.A7 66.749,80.349 67.249,80.349 USB-C.B7
  Bottom Layer w0.254: U1.12 59.27,81.48 59.75,81 63.25,81 64.675,79.575 USB-C.A7
USBC-DP: U1.13 USB-C.A6 USB-C.B6 | length 8.7
  Bottom Layer w0.254: U1.13 60.6,82.7 60.55,82.65 60.55,81.7 60.85,81.4 63.45,81.4 64.425,80.425 USB-C.A6 66.051,80.349 66.551,80.349 USB-C.B6
pads on no net: HEADER.29 JOYSTICK.4 TM4C123GXL.16 TM4C123GXL.21 U1.4 U1.7 U1.8 U1.9 U1.10 USB-C.A8 USB-C.B8

## Polygon pours and split planes (outlines as drawn)
GND on Top Layer "GND_L01_P000" (solid, pour order 0): 0,130 75,130 75,0 0,0
GND on Bottom Layer "GND_L02_P001" (solid, pour order 1): 0,130 75,130 75,0 0,0

## Keep-outs
Keep-Out Layer:
  lines w1: 0,2 ccw(c2,2) 2,0 73,0 ccw(c73,2) 75,2 75,128 ccw(c73,128) 73,130 2,130 ccw(c2,128) 0,128 0,2 ; 0,2 0,2

## Silkscreen, mask and mechanical layers (free items; w line width, h text height)
Top Overlay:
  lines w0.254: 12.15,112.5 12.15,111.5 37.15,111.5 37.15,112.5 ; 37.55,112.5 37.55,111.5 62.55,111.5 62.55,112.5
  text "PA2" at 12.544,127.346 h1.52 r270
  text "PA3" at 15.084,127.346 h1.52 r270
  text "PA4" at 17.624,127.346 h1.52 r270
  text "PB6" at 20.164,127.346 h1.52 r270
  text "PB7" at 22.704,127.346 h1.52 r270
  text "NC" at 25.244,127.346 h1.52 r270
  text "PF0" at 27.784,127.346 h1.52 r270
  text "PE0" at 30.324,127.346 h1.52 r270
  text "PB2" at 32.864,127.346 h1.52 r270
  text "GND" at 35.404,127.346 h1.52 r270
  text "PA7" at 37.944,127.346 h1.52 r270
  text "PA6" at 40.484,127.346 h1.52 r270
  text "PA5" at 43.024,127.346 h1.52 r270
  text "PB4" at 45.564,127.346 h1.52 r270
  text "PE5" at 48.104,127.346 h1.52 r270
  text "PE4" at 50.644,127.346 h1.52 r270
  text "PB1" at 53.184,127.346 h1.52 r270
  text "PB0" at 55.724,127.346 h1.52 r270
  text "PB5" at 58.264,127.346 h1.52 r270
  text "3V3" at 60.804,127.346 h1.52 r270
  text "PF4" at 12.544,116.846 h1.52 r270
  text "PD7" at 15.084,116.846 h1.52 r270
  text "PD6" at 17.624,116.846 h1.52 r270
  text "PC7" at 20.164,116.846 h1.52 r270
  text "PC6" at 22.704,116.846 h1.52 r270
  text "PC5" at 25.244,116.846 h1.52 r270
  text "PC4" at 27.784,116.846 h1.52 r270
  text "PB3" at 30.324,116.846 h1.52 r270
  text "PF3" at 32.864,116.846 h1.52 r270
  text "PF2" at 35.404,116.846 h1.52 r270
  text "PF1" at 37.944,116.846 h1.52 r270
  text "PE3" at 40.484,116.846 h1.52 r270
  text "PE2" at 43.024,116.846 h1.52 r270
  text "PE1" at 45.564,116.846 h1.52 r270
  text "PD3" at 48.104,116.846 h1.52 r270
  text "PD2" at 50.644,116.846 h1.52 r270
  text "PD1" at 53.184,116.846 h1.52 r270
  text "PD0" at 55.724,116.846 h1.52 r270
  text "GND" at 58.264,116.846 h1.52 r270
  text "+5V" at 60.804,116.846 h1.52 r270
  text "J4 (BOTTOM) / J2 (TOP)" at 14.554,109.804 h1
  text "J3 (BOTTOM) / J1 (TOP)" at 39.954,109.804 h1
  text "MSE450 ---> ASTEROIDS (1971) / Dmitrii Gusev (301297008) / Khamat Imanaliyev (301325999) / Aldiyar Mataibay (301326136)" at 12.75,74.75 h3 r90
  text "How to play? / 1. Connect USB-C to power / 2. Press SW1 to start / 3. Point with joystick / 4. Press SW1 to shoot" at 12.2,23.05 h4

## Text inside footprints (layer, text, board x,y; h text height)
HEADER: Top Overlay "2" at 64.01,119.2 h1.02 r180; Top Overlay "1" at 63.71,121.9 h1.02 r180; Top Overlay "39" at 11.59,121.9 h1.02 r180; Top Overlay "40" at 11.59,119.2 h1.02 r180